# Altium PCB MachLedNhayTheoNhacNhieuCot.PcbDoc
Units mil, origin at the board's own origin, x right, y up, seen from the top; angles counter-clockwise.
Board outline 2500 x 1700 mil, 2 copper layers (Top Layer, Bottom Layer), stack 65.792 mil thick; 48 components, 29 nets, 146 pads, 11 vias.
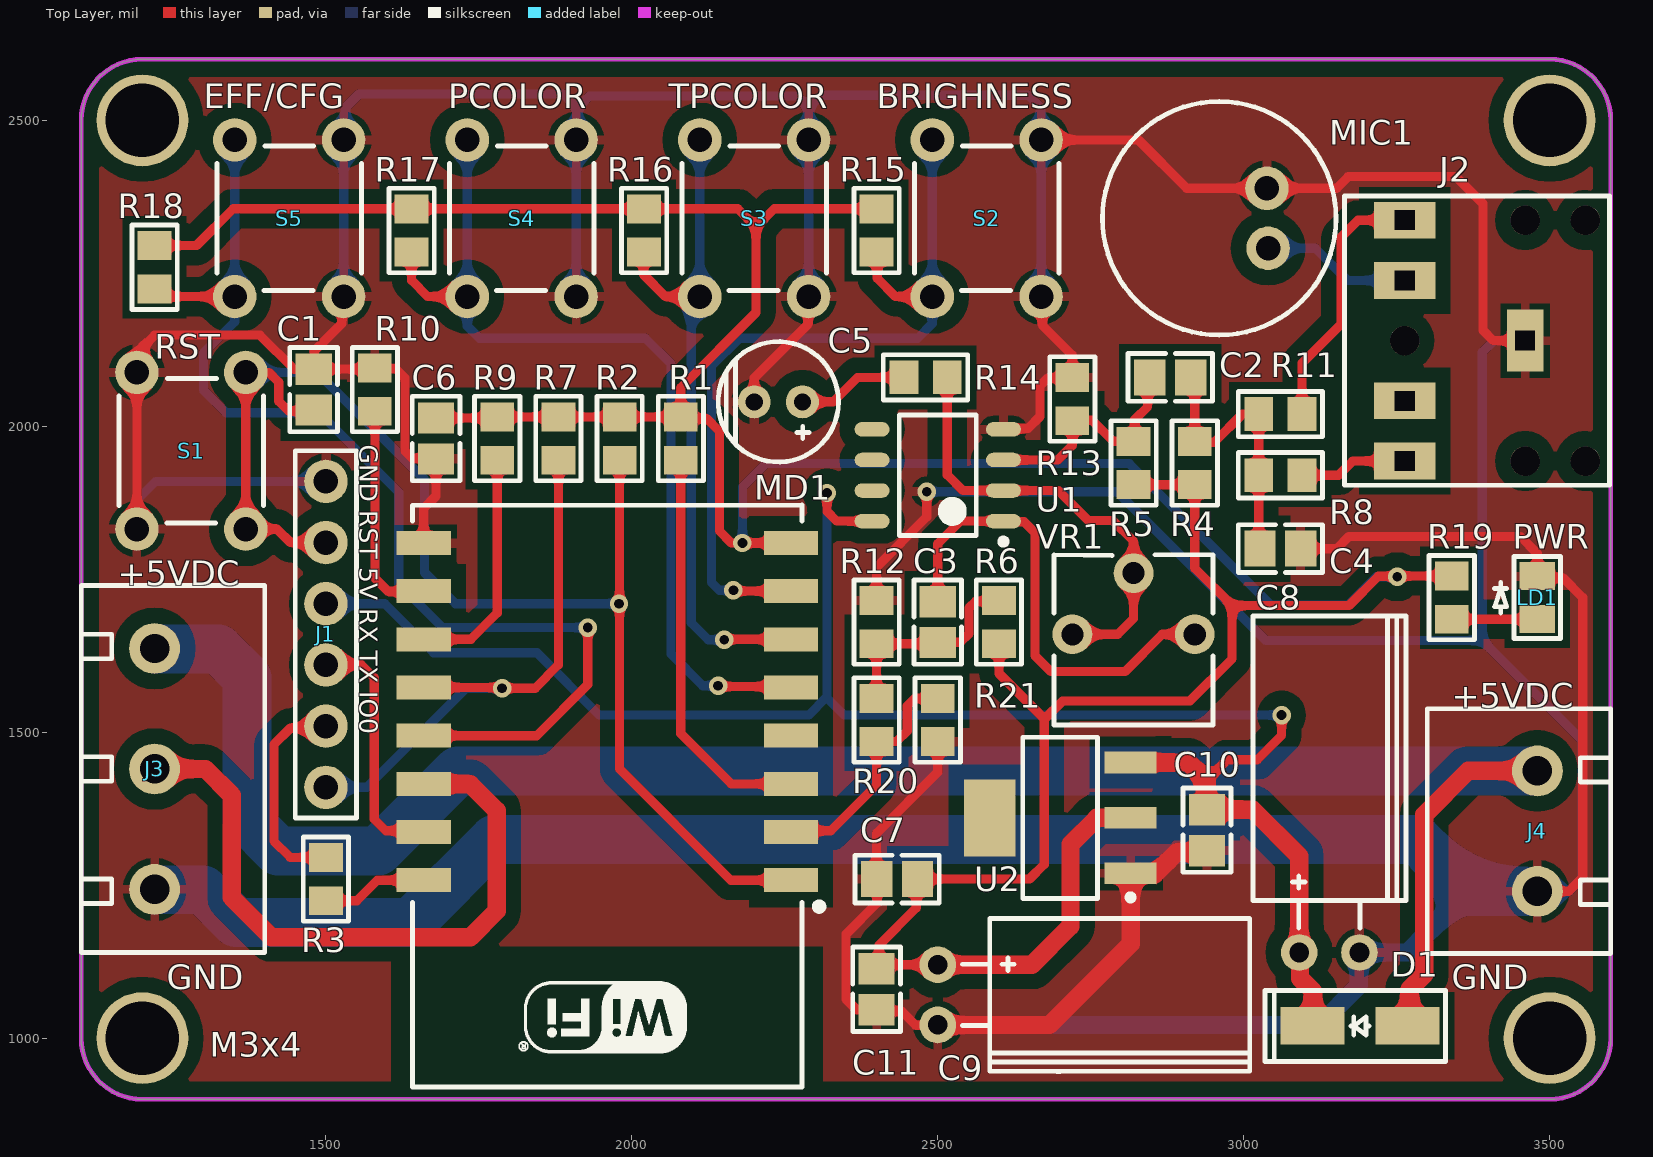
[diagram p0: Top Layer view]
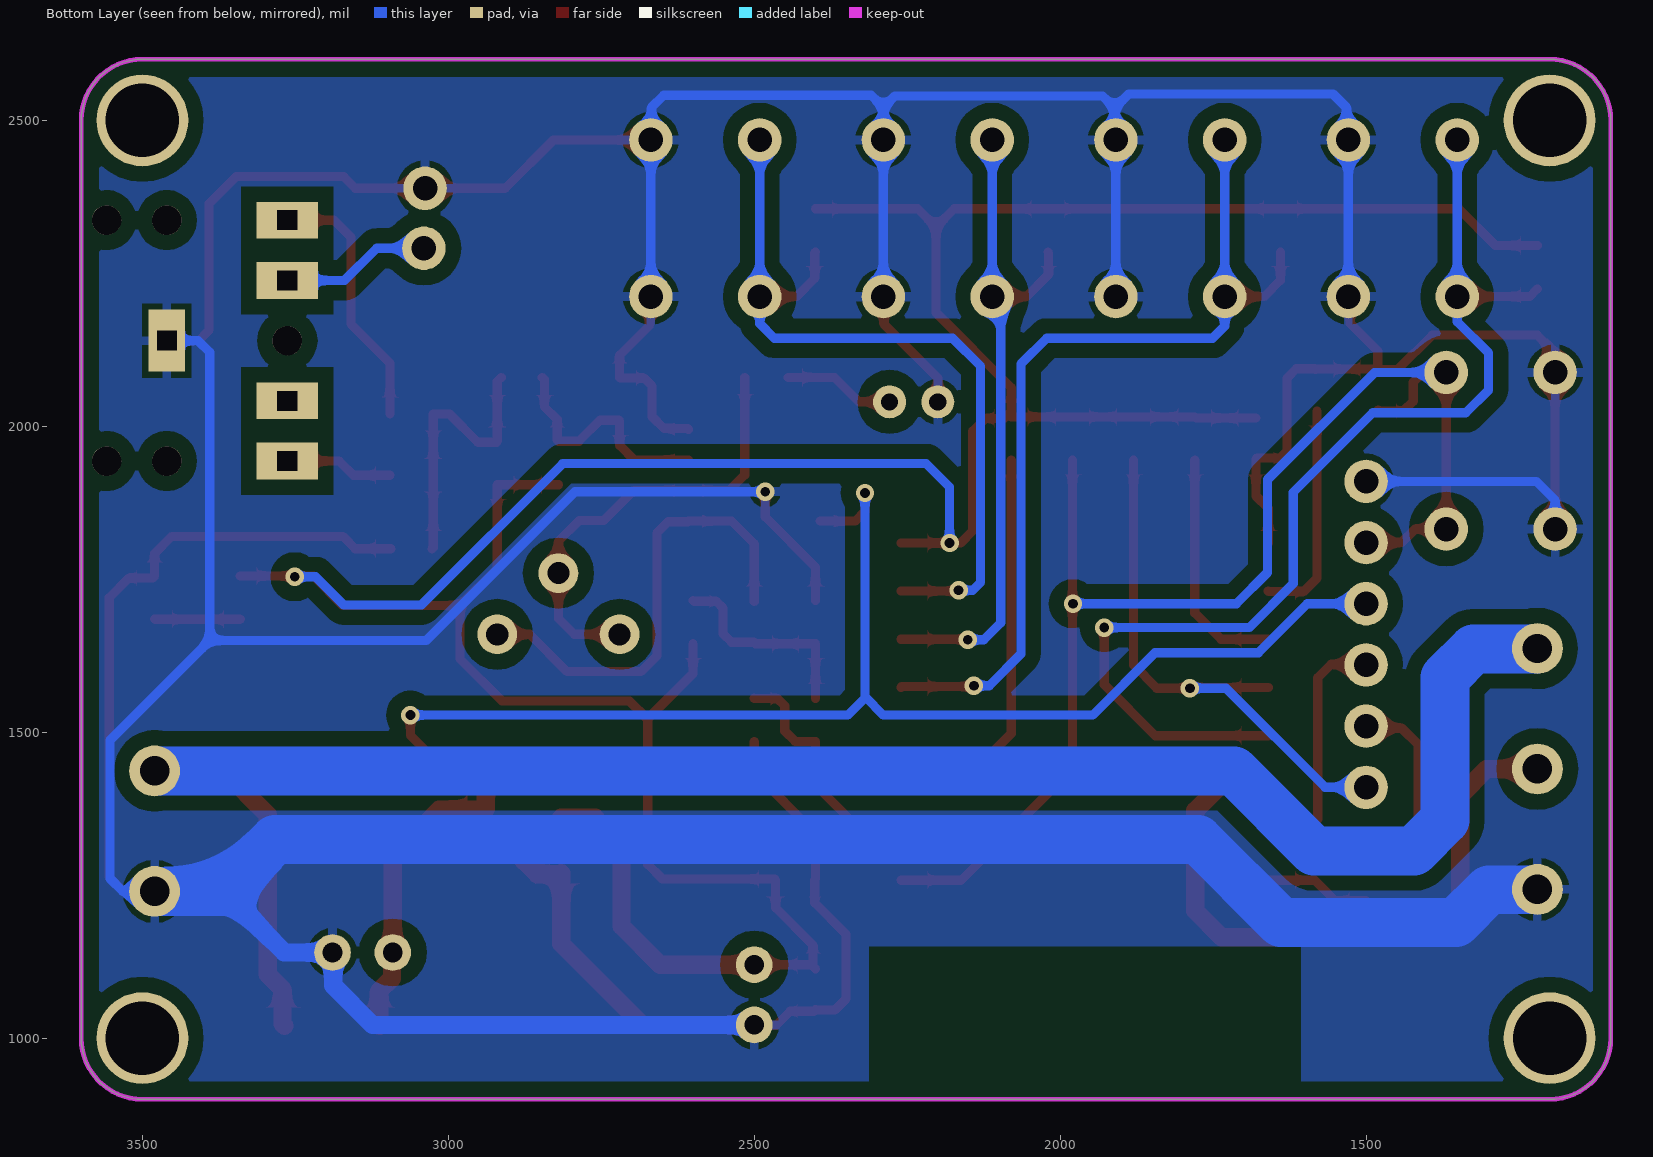
[diagram p1: Bottom Layer view, seen from below]
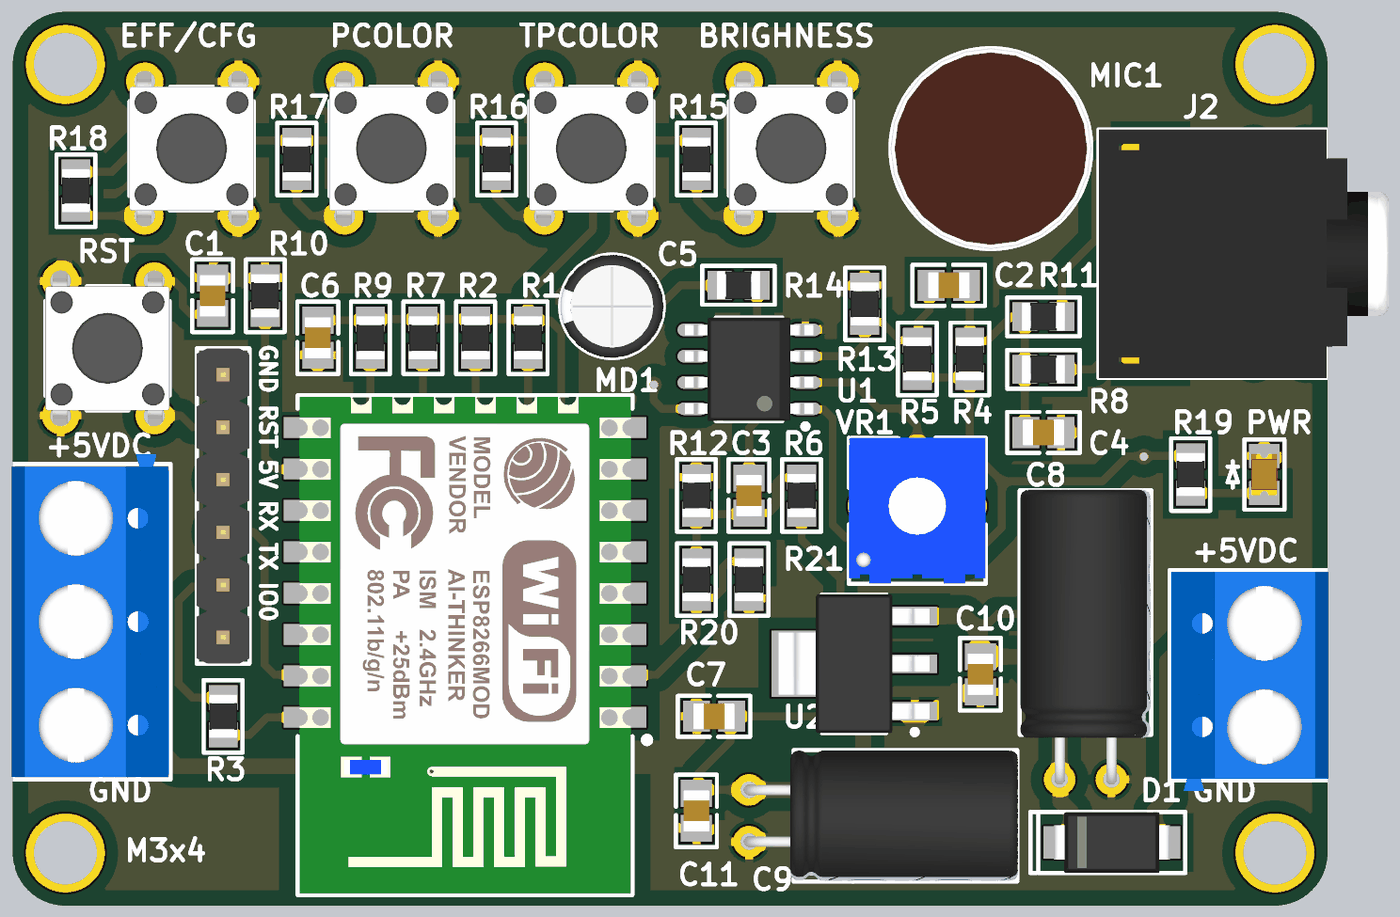
[diagram p2: 3D render of the assembled board from above, using the file's embedded part models]

## Layer stack, top to bottom
Top Solder: solder mask 0.4, Solder Resist, Dk 3.5
Top Layer: signal copper 1.4
Dielectric 1: dielectric 62.9921, FR-4, Dk 4.8
Bottom Layer: signal copper 1.4
Bottom Solder: solder mask 0.4, Solder Resist, Dk 3.5

## Board outline
1100,1000 1100,2500 cw(c1200,2500) 1200,2600 3500,2600 cw(c3500,2500) 3600,2500 3600,1000 cw(c3500,1000) 3500,900 1200,900 cw(c1200,1000)

## Design rules (kind name [scope] priority, off if disabled: settings)
Clearance Clearance_3 [InNamedPolygon('Top Layer-GND')] p1: gap=25 ignorepadtopadclearanceinfootprint=FALSE
Clearance Clearance_2 [InNamedPolygon('Bottom Layer-GND')] p2: gap=25 ignorepadtopadclearanceinfootprint=FALSE
Clearance Clearance_1 [InNamedPolygon('Bottom Layer-GND')] p3: gap=25 ignorepadtopadclearanceinfootprint=FALSE
Clearance [All] p4: gap=10 ignorepadtopadclearanceinfootprint=FALSE except(0: Arc-Hole Track-Hole SMDPad-Hole THPad-Hole Via-Hole Fill-Hole Poly-Hole Region-Hole Text-Hole)
PolygonConnect PolygonConnect_4 [All vs IsNamedPolygon('Bottom Layer-GND')] p1: connectstyle=Relief reliefconductorwidth=15 reliefentries=4 polygonreliefangle="90 Angle" airgapwidth=10
PolygonConnect PolygonConnect_3 [All vs IsNamedPolygon('Top Layer-GND')] p2: connectstyle=Relief reliefconductorwidth=15 reliefentries=4 polygonreliefangle="90 Angle" airgapwidth=10
PolygonConnect PolygonConnect_2 [All vs IsNamedPolygon('Bottom Layer-GND')] p3: connectstyle=Relief reliefconductorwidth=15 reliefentries=4 polygonreliefangle="90 Angle" airgapwidth=15
PolygonConnect PolygonConnect_1 [All vs IsNamedPolygon('Bottom Layer-GND')] p4: connectstyle=Relief reliefconductorwidth=15 reliefentries=4 polygonreliefangle="90 Angle" airgapwidth=15
PolygonConnect [All] p5: connectstyle=Relief reliefconductorwidth=10 reliefentries=4 polygonreliefangle="90 Angle" airgapwidth=10
RoutingVias [All] p1: holewidth=16 width=30 viastyle="Through Hole" minholewidth=16 minwidth=30 maxholewidth=28 maxwidth=50
SolderMaskExpansion [All] p1: expansion=4
Width [All] p1: maxlimit=80 minlimit=15 preferedwidth=30
30 further rules are at their usual default settings.

## Components (designator, comment, footprint, x,y, rotation, side; value= is the part's Value field where it differs from the comment)
C1 "100nF" C-0805 1480,2060 r270 top
C2 "100nF" C-0805 2880,2080 r180 top
C3 "100nF" C-0805 2500,1680 r270 top
C4 "2.2nF" C-0805 3060,1800 r0 top
C5 "10uF" C-ELE-2-5X7MM 2239.37,2040 r180 top
C6 "100nF" C-0805 1680,1980 r90 top
C7 "100nF" C-0805 2433.46,1260 r0 top
C8 "220uF" C-ELE-2.5-6.3X12MM-A 3140,1140 r90 top
C9 "100uF" C-ELE-2.5-6.3X11MM-A 2500,1070.79 r0 top
C10 "100nF" C-0805 2940,1340 r90 top
C11 "100nF" C-0805 2400,1080 r90 top
D1 "SS34" DO-214AC-SMA 3180,1020 r180 top
J1 "FTDI" JP1X6M-2.54 1500,1660 r90 top
J2 "PJ-307" PJ-307 3380,2140 r270 top
J3 "KF301-3P" KF301-3P-5.0 1220,1440 r270 top locked
J4 "KF301-2P" KF301-2P-5.0 3480,1338.43 r90 top locked
LD1 "PWR" LED-0805-RED 3480,1720 r90 top
MD1 "ESP8266-12E-1" ESP8266-12E-1 1960,1400 r180 top locked
MIC1 "MIC-CZ034C" MIC-CZ034C 2960,2340 r270 top
R1 "12k" R-0805 2080,1980 r270 top
R2 "12k" R-0805 1980,1980 r270 top
R3 "470R" R-0805 1500,1260 r90 top
R4 "4.7k" R-0805 2920,1940 r270 top
R5 "100k" R-0805 2820,1940 r270 top
R6 "100k" R-0805 2600,1680 r270 top
R7 "12k" R-0805 1880,1980 r270 top
R8 "4.7k" R-0805 3060,1920 r0 top
R9 "12k" R-0805 1780,1980 r270 top
R10 "12k" R-0805 1580,2060 r270 top
R11 "4.7k" R-0805 3060,2020 r0 top
R12 "100k" R-0805 2400,1680 r270 top
R13 "100k" R-0805 2720,2044.57 r270 top
R14 "10k" R-0805 2480,2080 r0 top
R15 "4.7k" R-0805 2400,2320 r90 top
R16 "4.7k" R-0805 2020,2320 r90 top
R17 "4.7k" R-0805 1640,2320 r90 top
R18 "4.7k" R-0805 1220,2260 r90 top
R19 "1k" R-0805 3340,1720 r270 top
R20 "220k" R-0805 2400,1520 r270 top
R21 "100k" R-0805 2500,1520 r270 top
S1 "RESET" SW4P-DIP-6X6MM 1280,1960 r270 top
S2 "EFFECT/CONFIG" SW4P-DIP-6X6MM 2580,2340 r90 top
S3 "PCOLOR" SW4P-DIP-6X6MM 2200,2340 r90 top
S4 "TPCOLOR" SW4P-DIP-6X6MM 1820,2340 r90 top
S5 "BRIGHNESS" SW4P-DIP-6X6MM 1440,2340 r90 top
U1 "LM358" SO8-1.27-150MIL 2500,1920 r180 top
U2 "AMS1117" SOT223 2700,1360 r180 top
VR1 "100k" VR-ADJ-3362P 2820,1660 r0 top

## Footprints (in the part's own frame and the unit in brackets; to place one, negate y for a bottom-side part, rotate by r counter-clockwise, add the part's x,y. Pads: shape width x height; smd on the part's side, far side on the other; paste and mask are expansions set on the pad)
C-0805 [mm]
  rect 1.3x1.5 smd: 1(-0.85,0) 2(0.85,0)
  silkscreen extent -1.75,-0.99 1.75,0.99, body extent -1,-0.62 1,0.63, height 1
C-ELE-2-5X7MM [mil]
  round 54 hole 28: 1(-39.37,0) 2(39.37,0)
  silkscreen extent -98,-98 98,98, body extent -98,-98 98,98, height 276
C-ELE-2.5-6.3X11MM-A [mil]
  round 60 hole 32: 1(0,49.21) 2(0,-49.21)
  silkscreen extent 40,-125 510,125, body extent -10,-124 512,124, height 252
C-ELE-2.5-6.3X12MM-A [mil]
  round 60 hole 32: 1(0,49.21) 2(0,-49.21)
  silkscreen extent 40,-125 550,125, body extent -10,-124 551,124, height 252
DO-214AC-SMA [mm]
  rect 2.65x1.55 smd: 1(-2.229,0) 2(1.721,0)
  silkscreen extent -3.8,-1.47 3.68,1.47, body extent -3.05,-1.47 2.55,1.48, height 2.9
ESP8266-12E-1 [mm]
  rect 2.25x1 smd: 1(-7.625,3.603) 2(-7.625,1.603) 3(-7.625,-0.397) 4(-7.625,-2.397) 5(-7.625,-4.397) 6(-7.625,-6.397) 7(-7.625,-8.397) 8(-7.625,-10.397) 9(7.625,-10.397) 10(7.625,-8.397) 11(7.625,-6.397) 12(7.625,-4.397) 13(7.625,-2.397) 14(7.625,-0.397) 15(7.625,1.603) 16(7.625,3.603)
  Multi-Layer pour cut-out: -8.966,12.827 8.992,12.827 8.992,6.35 -8.966,6.35
  silkscreen extent -8.94,-11.97 8.08,12.19, body extent -8,-11.89 8,12.11, height 3
JP1X6M-2.54 [mil]
  round 71 hole 40: 1(-250,0) 2(-150,0) 3(-50,0) 4(50,0) 5(150,0) 6(250,0)
  silkscreen extent -300,-50 300,50, body extent -300,-50 300,50, height 336
KF301-2P-5.0 [mil]
  round 83 hole 48: 1(-98.43,0) 2(98.43,0)
  silkscreen extent -200,-120 200,180, body extent -220,-122 197,177, height 394
KF301-3P-5.0 [mil]
  round 83 hole 48: 1(-196.85,0) 2(0,0) 3(196.85,0)
  silkscreen extent -300,-120 300,180, body extent -319,-122 295,177, height 394
LED-0805-RED [mm]
  rect 1.16x1.47 smd: 1(-0.89,0) 2(0.89,0)
  silkscreen extent -1.7,-0.97 1.7,1.78, body extent -1,-0.62 1,0.64, height 0.8
MIC-CZ034C [mil]
  round 71 hole 40: 1(-49,78) 2(49,80)
  silkscreen extent -191,-191 191,191, body extent -191,-191 191,191, height 185
PJ-307 [mil]
  round 48 hole 48 unplated: 0(-196.85,80) 0(-196.85,178.43) 0(0,-116.85) 0(196.85,80) 0(196.85,178.43)
  rect 101x60 hole 32 square: 1(0,80)
  rect 60x101 hole 32 square: 2(196.85,-116.85) 3(98.43,-116.85) 4(-98.43,-116.85) 5(-196.85,-116.85)
  silkscreen extent -236,-215 236,218, body extent -236,-215 236,336, height 218
R-0805 [mm]
  rect 1.2x1.4 smd: 1(-0.9,0) 2(0.9,0)
  silkscreen extent -1.75,-0.94 1.75,0.94, body extent -1.05,-0.67 1.05,0.68, height 0.6
SO8-1.27-150MIL [mm]
  oval 1.45x0.6 smd: 1(-2.725,1.905) 2(-2.725,0.635) 3(-2.725,-0.635) 4(-2.725,-1.905) 5(2.725,-1.905) 6(2.725,-0.635) 7(2.725,0.635) 8(2.725,1.905)
  silkscreen extent -2.85,-2.5 1.6,2.88, body extent -3.1,-2.5 3.1,2.5, height 1.75
SOT223 [mm]
  rect 2.15x0.9 smd: 1(-2.925,2.3) 2(-2.925,0) 3(-2.925,-2.3)
  rect 2.15x3.2 smd: 4(2.925,0)
  silkscreen extent -3.05,-3.35 1.55,3.42, body extent -3.65,-3.35 3.65,3.35, height 1.8
SW4P-DIP-6X6MM [mil]
  round 71 hole 40: 1(-128,89) 2(-128,-89) 3(128,-89) 4(128,89)
  silkscreen extent -118,-118 118,118, body extent -151,-118 151,118, height 200
VR-ADJ-3362P [mil]
  round 65 hole 36: 1(-100,0) 2(0,100) 3(100,0)
  silkscreen extent -130,-148 130,130, body extent -130,-148 130,130, height 185

## Part data
C1 C2 C3 C4 C6 C7 C10 C11: library part CAP, "Cac Loai Tu Khong Phan Cuc"
C5 C8 C9: library part CAP-ELE, "Cac Loai Tu Hoa"
D1: "Diode Schottky 1N5822 3A 40V Dan"
J1: library part JP1X6-2.54, "Jump Don 6 Chan 2.54mm"
J2: "Jack Ket Noi Audio 3.5MM"
J3: "Dau Ket Noi KF301 3 Chan"
J4: "Dau Ket Noi KF301 2 Chan"
LD1: library part LED, "Cac Loai LED Don"
MD1: "Module ESP8266-12E"
MIC1: "Microphone CZ034C"
R1 R2 R3 R4 R5 R6 R7 R8 R9 R10 R11 R12 R13 R14 R15 R16 R17 R18 R19 R20 R21: library part RES, "Cac Loai Dien Tro"
S1 S2 S3 S4 S5: library part SW4P-DIP-6X6MM, "Nut Nhan 4 Chan 6X6MM"
U1: "IC OPAM 2 Kenh"
U2: "IC On Ap Tuyen Tinh AMS1117 1A"
VR1: library part VRES, "Cac Loai Bien Tro"

## Free pads (board coordinates)
  round 150 hole 120: 0(1200,1000) 0(1200,2500) 0(3500,1000) 0(3500,2500)

## Via types
v1: diameter 30, hole 16, Top Layer to Bottom Layer, tented both sides, 11 vias

## Nets (pads, with @x,y where several pads share a name; then routed paths per layer and width w, separated by ;. In a path a pad name is that pad's centre, name@x,y a point inside that pad or via, vN(x,y) a via of type N, cw(c..) or ccw(c..) an arc to the next point about the centre after c; other vN are vias at no path point)
+3.3: C6.2 C7.2 C9.1 C11.2 MD1.8 R1.1 R2.1 R4.2 R5.2 R6.2 R7.1 R9.1 R15.2 R16.2 R17.2 R18.2 R19.1 U2.2 | length 6157.3
  Top Layer w15: R18.2 1288.43,2295.43 1348.43,2355.43 R17.2 R16.2 2173,2355.43 2203,2325.43 ; C6.2 1778.03,2013.46 R9.1 R7.1 R2.1 R1.1 ; MD1.8 v1(2180.67,1809.33) 2162.67,1809.33 2143,1829 2143,1992 2122,2013 2091.57,2013 2084.57,2020 R1.1 ; C11.2 C11.2@2404,1117.46 ; R15.2 2233,2355.43 2203,2325.43 ; C9.1 2406.54,1120 C11.2@2404,1117.46 ; R6.2 2600,1596 2674.5,1521.5 2704,1551 2912,1551 2981,1620 2981,1707 ; 2674,1521 2674,1284 2650,1260 C7.2 2465,1258.07 2465,1213 2404,1152 C11.2@2404,1117.46 ; R5.2 R4.2 2920,1768 2981,1707 ; v1(3251,1754) 3250,1755 3220,1755 3172,1707 2981,1707 ; v1@3251,1755.43 R19.1 ; R1.1 2080,2063 2203,2186 2203,2325.43
  Top Layer w30: C9.1 2654,1120 2717,1183 2717,1317 2760,1360 U2.2
  Bottom Layer w15: v1(2180.67,1809.33) 2180.67,1900.67 2219,1939 2813,1939 3044,1708 3171,1708 3217,1754 v1(3251,1754)
+5: C8.1 C10.2 D1.2 J1.4 U1.8 U2.3 | length 2947.2
  Top Layer w15: v1(2319,1891) 2319,1861 2335,1845 U1.8 ; 2939,1421 2973,1455 3022,1455 3062,1495 v1(3062,1528)
  Top Layer w30: U2.3 2816.71,1449 2818.26,1450.55 2909.45,1450.55 2939,1421 2939,1374.46 C10.2 3014.53,1373.46 3090.79,1297.2 C8.1 3092,1138.79 3092,1098 3113,1077 3113,1020.76 D1.2
  Bottom Layer w15: J1.4 1596,1710 1676,1630 1845,1630 1947,1528 2289,1528 2318,1557 ; v1(2319,1891) 2319,1558 2318,1557 ; v1(3062,1528) 2347,1528 2318,1557
A0: C3.2 R6.1 R12.2 R20.1 | length 343.1
  Top Layer w15: R20.1 R12.2 2498.03,1644.57 C3.2 2500.46,1647 2537,1647 2551,1661 2551,1703 2562,1714 2598.57,1714 R6.1
ADC: MD1.2 R20.2 R21.1 | length 395.7
  Top Layer w15: MD1.2 2262.28,1338.98 2324.98,1338.98 2400,1414 R20.2 2400.43,1485 2433,1485 2450,1502 2450,1543 2462,1555 2499.57,1555 R21.1
EN: MD1.3 R1.2 | length 660.9
  Top Layer w15: R1.2 2080,1498 2162.37,1415.63 MD1.3
GND: C1.1 C4.2 C5.2 C6.1 C7.1 C8.2 C9.2 C10.1 C11.1 J1.6 J2.1 J3.3 J4.1 LD1.2 MD1.9 MIC1.1 R10.1 R12.1 R13.1 R21.2 S1.2 S1.3 S2.2 S2.3 S3.2 S3.3 S4.2 S4.3 S5.2 S5.3 U1.4 U2.1 | length 13646.8
  Top Layer w15: S1.3 S1.2 1193,2090 1193,2122 1220,2149 1392,2149 1448,2093 1479.54,2093 C1.1 ; S5.2 1526,2209 1526,2168 1481,2123 1481,2094.46 C1.1 ; MD1.9 1659.8,1865.8 1680,1886 C6.1 1678.54,1948 1641,1948 1629,1960 1629,2079 1614,2094 1583.43,2094 1582.43,2093 1581.97,2093.46 C1.1 ; C5.2 2200,2079 2288,2167 2288,2211 S3.2 ; R12.1 2400,1770 2482,1852 v1(2482,1893) ; C9.2 2499.43,1021 2464,1021 2441,1044 2402.54,1044 C11.1 2399.46,1046 2368,1046 2350,1064 2350,1170 2401,1221 2401,1259 C7.1 2400,1335 2500,1435 R21.2 ; U1.4 2608.93,1996.65 2647.65,1996.65 2667,2016 2667,2066 2680,2079 2719,2079 R13.1 2720,2116 2671,2165 2671,2210 S2.2 ; S2.3 2828,2468 2907,2389 MIC1.1 3152,2389 3171,2408 3347,2408 3391,2364 3391,2157 3408,2140 J2.1 ; C4.2 3152,1800 3172,1820 3452,1820 3480,1792 LD1.2 3483.04,1752 3522,1752 3554,1720 3554,1263 3531,1240 J4.1
  Top Layer w30: C9.2 2682.57,1021.57 2815.16,1154.16 U2.1 2816.61,1268 2855,1268 2891,1304 2937.46,1304 C10.1
  Bottom Layer w15: S1.3 1191,1879 1222,1910 J1.6 ; S5.2 S5.3 1532,2471 1532,2521 1554,2543 1888,2543 1911,2520 ; S4.2 S4.3 1911,2470 1911,2520 ; S3.2 S3.3 2289,2521 ; v1(2482,1893) 2793,1893 3036,1650 3390,1650 ; S2.2 S2.3 2668,2469 2668,2521 2648,2541 2309,2541 2289,2521 ; J2.1 3409,2140 3390,2121 3390,1650 ; J4.1 3532,1240 3553,1261 3553,1487 3390,1650 ; 1911,2520 1931,2540 2270,2540 2289,2521
  Bottom Layer w30: C9.2 3123.57,1021.57 3188,1086 3188,1138.79 C8.2 3268,1140 3368,1240
  Bottom Layer w80: J3.3 1220.57,1242.58 1299.42,1242.58 1353,1189 1639,1189 1775,1325 3283,1325 3368,1240 J4.1
GPIO0: J1.1 MD1.12 R7.2 | length 926.1
  Top Layer w15: MD1.12 1786.89,1573.11 v1(1788,1572) 1842,1572 1880,1610 R7.2
  Bottom Layer w15: J1.1 1567,1410 1729,1572 v1(1788,1572)
GPIO2: MD1.11 R9.2 | length 387.6
  Top Layer w15: MD1.11 1736.85,1651.85 1780,1695 R9.2
GPIO4: MD1.13 R18.1 S5.1 S5.4 | length 1838.2
  Top Layer w15: R18.1 1232.57,2212 S5.1 ; MD1.13 1844.37,1494.37 1928,1578 v1(1928,1671)
  Bottom Layer w15: S5.4 S5.1 1351,2171 1300,2120 1300,2059 1337,2022 1489,2022 1619,1892 1619,1743 1691,1671 v1(1928,1671)
GPIO5: J3.2 MD1.14 | length 1089.8
  Top Layer w30: J3.2 1303,1440 1346,1397 1346,1230 1411,1165 1736,1165 1779,1208 1779,1372 1735.68,1415.32 1660.11,1415.32 MD1.14
GPIO12: MD1.6 R16.1 S3.1 S3.4 | length 1113.8
  Top Layer w15: R16.1 2019,2283.57 2019,2248 2055,2212 S3.1 ; v1(2151,1651) 2151.85,1651.85 MD1.6
  Bottom Layer w15: S3.4 S3.1 2097,2198 2097,1679 2125,1651 v1(2151,1651)
GPIO13: MD1.7 R15.1 S2.1 S2.4 | length 1324.6
  Top Layer w15: v1(2166,1732) 2167.41,1730.59 MD1.7 ; R15.1 2401,2283.57 2401,2242 2431,2212 S2.1
  Bottom Layer w15: v1(2166,1732) 2143,1732 2130,1745 2130,2098 2176,2144 2467,2144 2491,2168 S2.1 S2.4
GPIO14: MD1.5 R17.1 S4.1 S4.4 | length 1503.7
  Top Layer w15: R17.1 1640,2238.44 1666.44,2212 S4.1 ; v1(2141,1576) 2142.44,1574.56 2258.74,1574.56 MD1.5
  Bottom Layer w15: S4.4 S4.1 1731,2164 1751,2144 2022,2144 2064,2102 2064,1628 2116,1576 v1(2141,1576)
GPIO15: MD1.10 R10.2 | length 361.7
  Top Layer w15: R10.2 1580,1752 1602,1730 1659.2,1730 MD1.10
GPIO16: MD1.4
NetC2_1: C2.1 C4.1 R4.1 R8.1 R11.1 | length 452.3
  Top Layer w15: C2.1 2920,2073.46 R4.1 2921.43,1974 2952,1974 2998,2020 R11.1 R8.1 3024.57,1801.97 C4.1
NetC2_2: C2.2 R5.1 R13.2 U1.3 | length 393.1
  Top Layer w15: U1.3 2696,1945 2720,1969 R13.2 2720.13,2009 2721.13,2010 2752,2010 2786.57,1975.43 R5.1 2822,1977.43 2822,2011 2843,2032 2843,2076.46 C2.2
NetC3_1: C3.1 U1.1 VR1.3 | length 774.8
  Top Layer w15: C3.1 2500,1808 2537,1845 U1.1 2608.28,1844 2641,1844 2659,1826 2659,1625 2685,1599 2806,1599 2867,1660 VR1.3
NetC5_1: C5.1 R14.1 | length 182.4
  Top Layer w15: C5.1 2329,2040 2369,2080 R14.1
NetJ1_2: J1.2 R3.2 | length 351.4
  Top Layer w15: R3.2 1441.57,1295.43 1415,1322 1415,1480 1442,1507 1497,1507 J1.2
NetJ2_2: J2.2 R8.2 | length 177.3
  Top Layer w15: R8.2 3155,1920 3178.15,1943.15 J2.2
NetJ2_4: J2.4 MIC1.2 | length 244.9
  Bottom Layer w15: MIC1.2 3117,2291 3169.57,2238.43 J2.4
NetJ2_5: J2.5 R11.2 | length 431
  Top Layer w15: R11.2 3095.43,2103.43 3159,2167 3159,2309 3186.85,2336.85 J2.5
NetLD1_1: LD1.1 R19.2 | length 140.2
  Top Layer w15: R19.2 3479.61,1684.57 LD1.1
NetR14_2: R14.2 U1.2 VR1.1 VR1.2 | length 745.7
  Top Layer w15: R14.2 2515.43,1920.57 2541,1895 U1.2 2697,1895 2746,1846 2786,1846 2820,1812 VR1.2 2820,1686 2794,1660 VR1.1
RST: C1.2 J1.5 MD1.1 R2.2 S1.1 S1.4 | length 2267.7
  Top Layer w15: C1.2 1478.46,2025 1439,2025 1423,2041 1423,2072 1407,2088 S1.1 S1.4 1420,1832 1442,1810 J1.5 ; R2.2 1980,1440 2161.85,1258.15 MD1.1
  Bottom Layer w15: S1.1 1486,2088 1661,1913 1661,1761 1712,1710 v1(1979,1710)
RX0: J1.3 MD1.15 | length 410.7
  Top Layer w15: J1.3 1502,1612 1504,1610 1505,1611 1557,1611 1579,1589 1579,1358 1598,1339 1657.69,1339 MD1.15
TX0: MD1.16 R3.1 | length 173.7
  Top Layer w15: R3.1 1550.57,1224.57 1584.15,1258.15 MD1.16
VIN: D1.1 J3.1 J4.2 | length 3158.5
  Top Layer w30: D1.1 3271,1023.24 3271,1080 3295,1104 3295,1365 3366.85,1436.85 J4.2
  Bottom Layer w80: J3.1 1220.57,1636.28 1324.14,1636.28 1371,1589.41 1371,1356.86 1421.86,1306 1585,1306 1715.85,1436.85 J4.2
pads on no net: J2.0 J2.3 U1.5 U1.6 U1.7 U2.4

## Polygon pours and split planes (outlines as drawn)
GND on Top Layer "Top Layer-GND" (solid, remove dead copper, pour order 0): 1100,900 1100,2600 3600,2600 3600,900
GND on Bottom Layer "Bottom Layer-GND" (solid, remove dead copper, pour order 1): 1100,900 1100,2600 3600,2600 3600,900

## Keep-outs
Keep-Out Layer:
  the board outline again, w7.87

## Silkscreen, mask and mechanical layers (free items; w line width, h text height)
Top Overlay:
  text "EFF/CFG" at 1300,2520 h40
  text "PCOLOR" at 1700,2520 h40
  text "TPCOLOR" at 2060,2520 h40
  text "BRIGHNESS" at 2400,2520 h40
  text "RST" at 1220,2110 h40
  text "GND RST 5V RX TX IO0" at 1555,1970 h30 r270
  text "+5VDC" at 1160,1740 h40
  text "+5VDC" at 3340,1540 h40
  text "GND" at 1240,1080 h40
  text "GND" at 3340,1080 h40
  text "M3x4" at 1310,970 h40
Bottom Solder:
  lines w30: 1218,1253 1286,1253 1351,1188 1642,1188 1778,1324 3290,1324 3374,1240 3480,1240 ; 1220,1636.85 1326.15,1636.85 1380,1583 1380,1347 1417,1310 1590,1310 1722,1442 3465.15,1442 3475.15,1432